# EAGLE board Вездекод - 10 баллов (Noobe) (EAGLE 7.6.0)

Size 56.82 x 53.33 mm. Coordinates in mm from the lower left corner, seen from the top.
Outline: 0,0 56.82,0 56.82,53.33 0,53.33 0,0
Copper layers (1*16): Top 0.035mm / dielectric 1.5mm / Bottom 0.035mm
Design rules "default": minimum track width 10mil, minimum drill 24mil, track to track 8mil, track to pad 8mil, pad to pad 8mil, via to via 8mil, smd to smd 8mil, copper to edge 40mil, drill to drill 8mil, minimum pad ring 10mil, minimum via ring 8mil, stop-mask expansion 4mil, vias tented up to drill 0mil, thermal gap 10mil

## Footprints (pad centres in the part's own frame; a part is rotated, then mirrored left to right if it is on the bottom)
DC-POWER = drill 0.889 pad 2.54 octagon: + 0,2.54; - 0,-2.54
2P-2.54-65/35MIL = drill 0.889 pad 1.651 square: 1 0,1.27 | drill 0.889 pad 1.651: 2 0,-1.27
0207/10 = drill 0.813 octagon: 1 -5.08,0; 2 5.08,0

## Placement (x,y rotation side)
BATbat1  [DC-POWER]  5,60.88 0 top  (outside the outline)
BATbat2  [DC-POWER]  5,48.18 0 top
BATbat3  [DC-POWER]  5,10.08 0 top
BATbat4  [DC-POWER]  5,22.78 0 top
BATbat5  [DC-POWER]  5,35.48 0 top
BATbat6  [DC-POWER]  5,73.58 0 top  (outside the outline)
BATbat7  [DC-POWER]  5,86.28 0 top  (outside the outline)
BATbat8  [DC-POWER]  5,98.98 0 top  (outside the outline)
BATbat9  [DC-POWER]  5,111.68 0 top  (outside the outline)
BATbat10  [DC-POWER]  5,124.38 0 top  (outside the outline)
M1  [2P-2.54-65/35MIL]  5,137.08 0 top  (outside the outline)
Metermulti  [DC-POWER]  5,149.78 0 top  (outside the outline)
Rresistor  0.1k‎Ω  [0207/10]  5,162.48 0 top  (outside the outline)

## Library data of the parts
BATbat1-BATbat10 M1 Metermulti Rresistor = AUTODESK_CIRCUITS_BREADBOARD

## Nets
N$1: BATbat3.+ BATbat4.-
N$2: BATbat2.+ BATbat3.-
N$3: BATbat1.+ BATbat2.-
N$4: BATbat9.- BATbat10.+
N$5: BATbat8.- BATbat9.+
N$6: BATbat7.- BATbat8.+
N$7: BATbat6.- BATbat7.+
N$8: BATbat1.- BATbat6.+
N$9: BATbat4.+ BATbat5.-
N$10: M1.1 Metermulti.+ Rresistor.1
N$11: BATbat10.- M1.2 Metermulti.-
N$12: BATbat5.+ Rresistor.2

## Tracks (layer width: path | path; a pad name or v marks a point on that pad's centre or on a via)
N$1  (1 unrouted)
N$2  (1 unrouted)
N$3  (1 unrouted)
N$4  (1 unrouted)
N$5  (1 unrouted)
N$6  (1 unrouted)
N$7  (1 unrouted)
N$8  (1 unrouted)
N$9  (1 unrouted)
N$10  (2 unrouted)
N$11  (2 unrouted)
N$12  (1 unrouted)